# Altium PCB lagd_pcb.PcbDoc (part 2 of 7)
Units mm, origin at the board's own origin, x right, y up, seen from the top; angles counter-clockwise.
Board outline 172 x 145 mm, 6 copper layers (Top Layer, Layer 1, Layer 2, Layer 3, Layer 4, Bottom Layer), stack 0.816 mm thick; 588 components, 338 nets, 2165 pads, 565 vias.
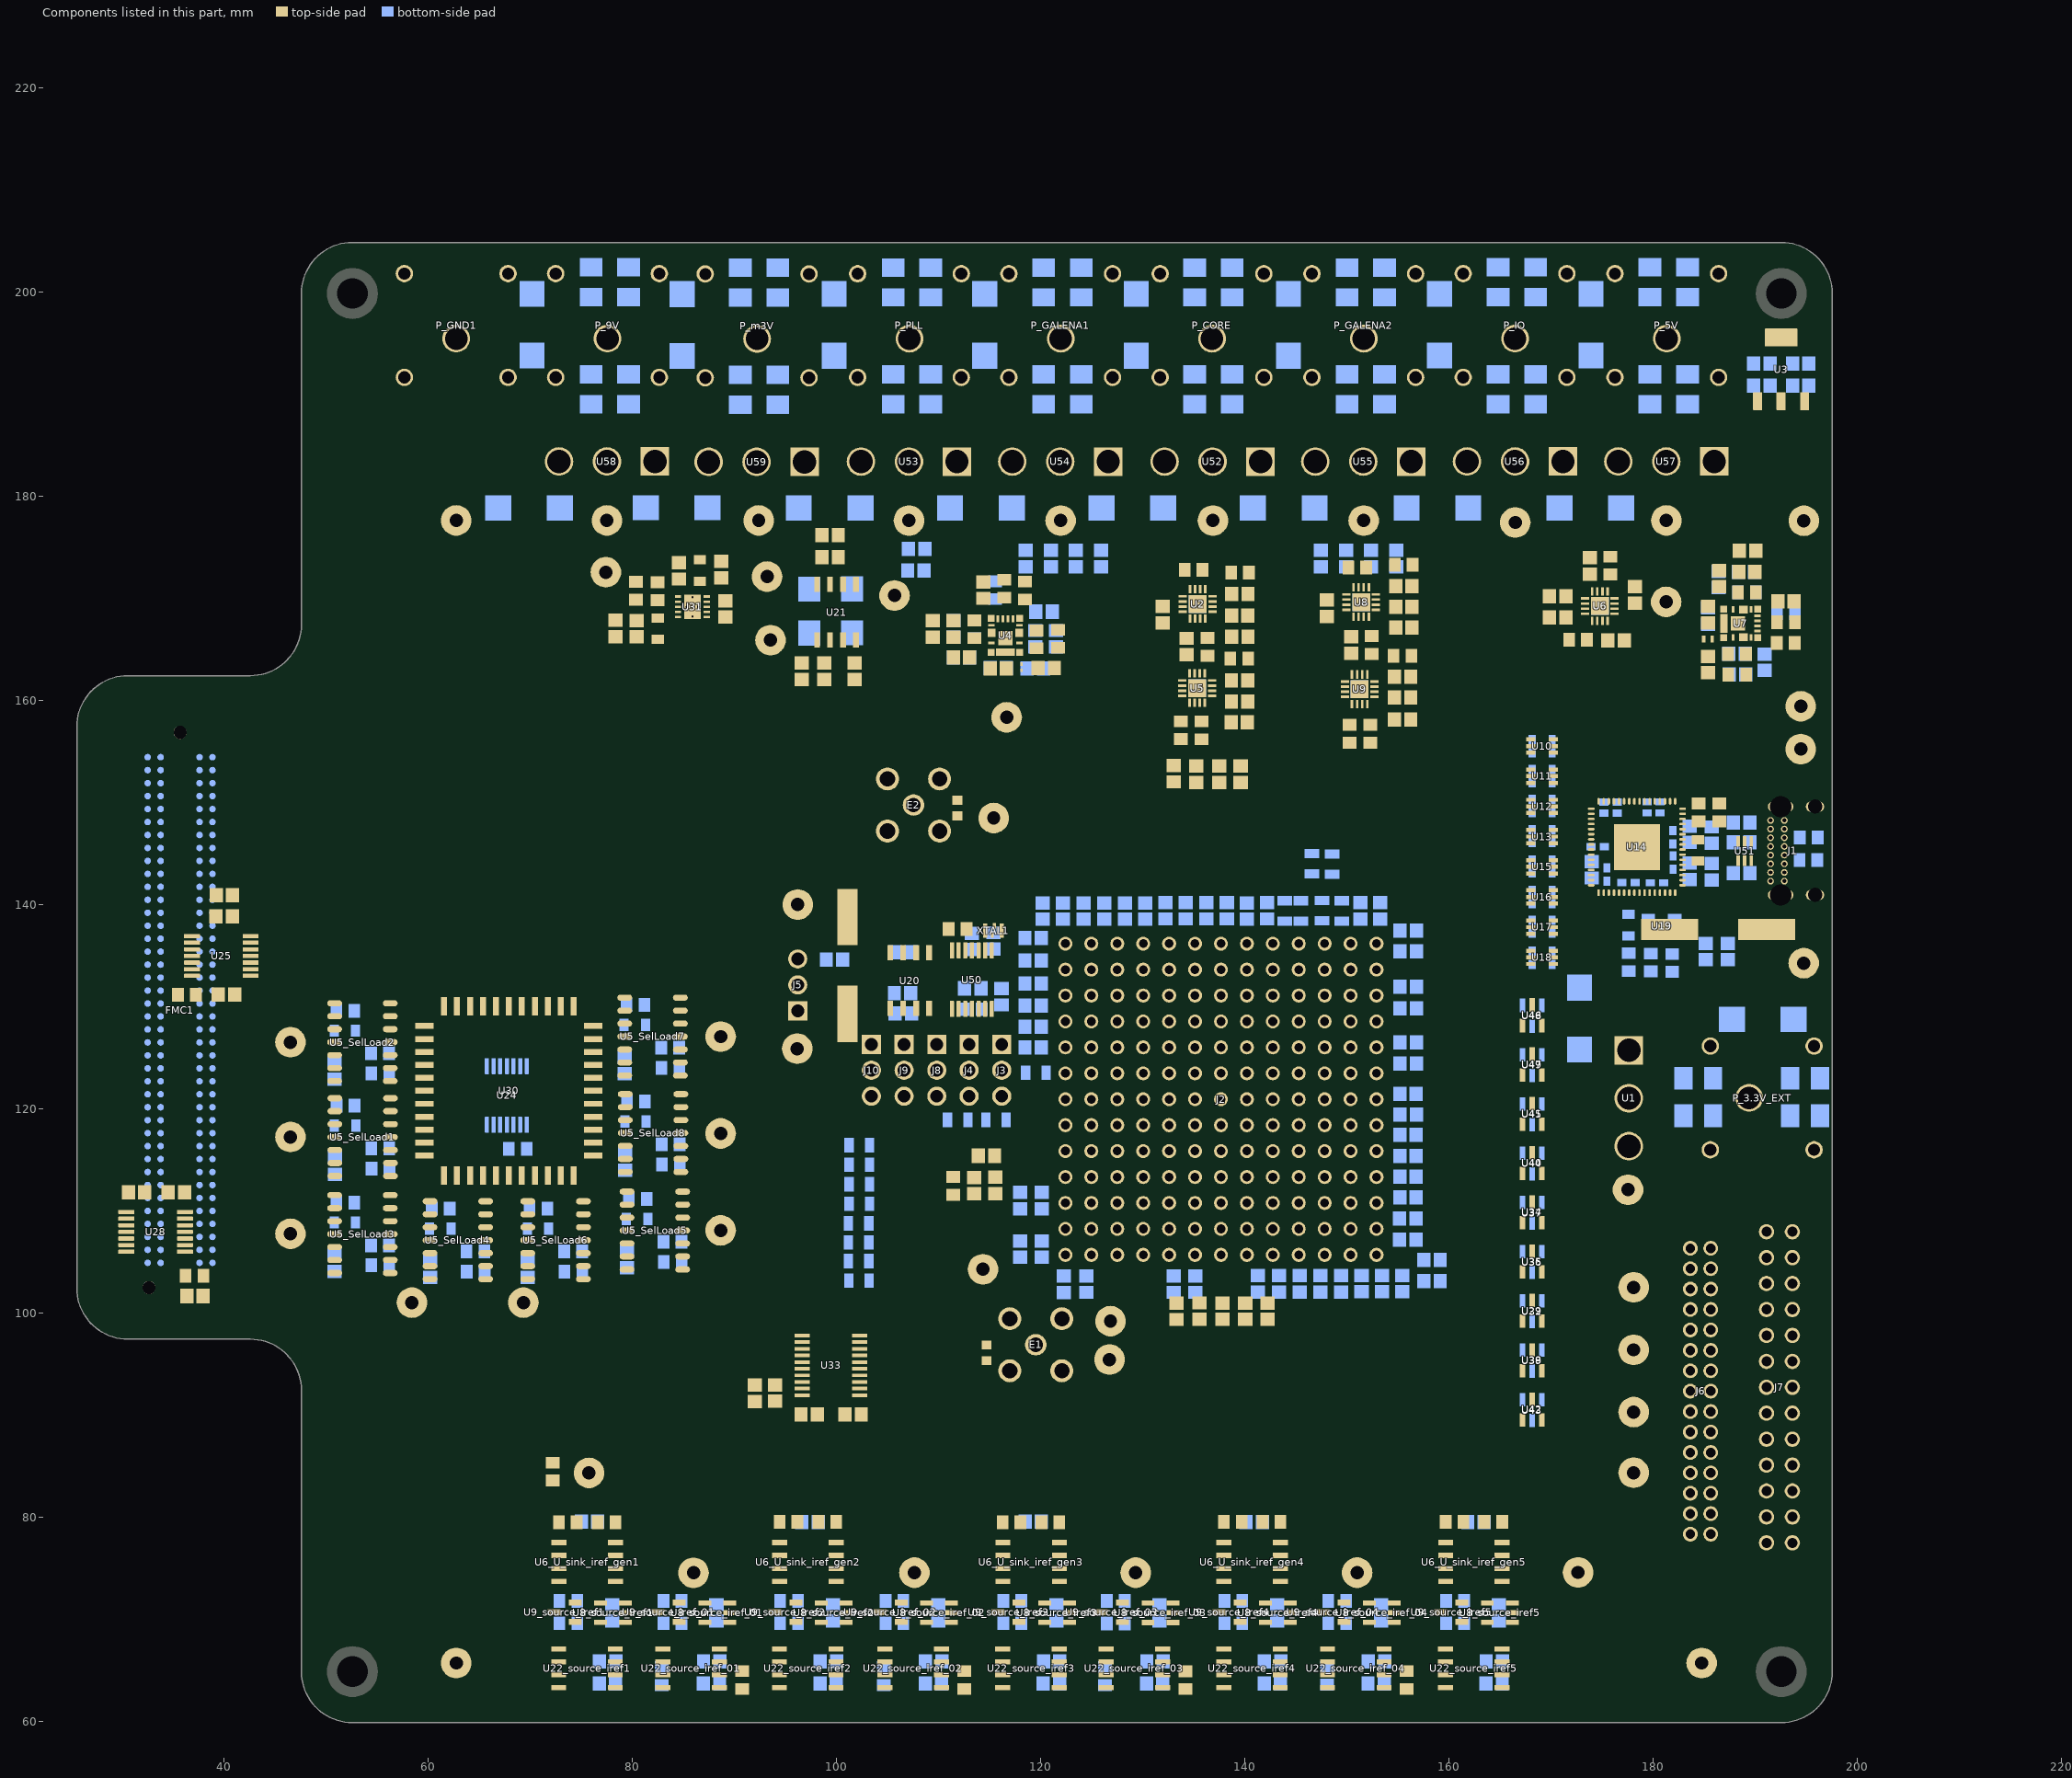
[diagram p6: the components of this part, seen from the top]

## Components (designator, comment, footprint, x,y, rotation, side; value= is the part's Value field where it differs from the comment) (continued)
U22_source_iref_04 "ALD1117SAL" 8-SOIC_ALD 150.88,65.183 r0 top (schematic designator U22)
U24 "TXU0104PWR" SOP65P640X120-14N 67.7,121.3 r270 bottom
U25 "TXU0104PWR" SOP65P640X120-14N 39.728,134.961 r0 top
U28 "TXU0104PWR" SOP65P640X120-14N 33.293,107.931 r0 top
U29 "BAT54LT1G" SOT-23-3_1P4X3P040_ONS 168.15,100.2 r0 top
U30 "HV9308PJ-G" PLCC44_MC_MCH 67.9,121.75 r180 top
U31 "TPS7A3901DSCR" DSC0010J 85.888,169.162 r180 top
U32 "BAT54LT1G" SOT-23-3_1P4X3P040_ONS 168.15,100.15 r0 bottom
U33 "" RU_20_ADI 99.456,94.85 r180 top
U34 "BAT54LT1G" SOT-23-3_1P4X3P040_ONS 168.15,109.85 r0 top
U35 "BAT54LT1G" SOT-23-3_1P4X3P040_ONS 168.15,105.025 r0 top
U36 "BAT54LT1G" SOT-23-3_1P4X3P040_ONS 168.15,104.975 r0 bottom
U37 "BAT54LT1G" SOT-23-3_1P4X3P040_ONS 168.15,109.8 r0 bottom
U38 "BAT54LT1G" SOT-23-3_1P4X3P040_ONS 168.15,95.35 r0 top
U39 "BAT54LT1G" SOT-23-3_1P4X3P040_ONS 168.15,95.325 r0 bottom
U40 "BAT54LT1G" SOT-23-3_1P4X3P040_ONS 168.15,114.675 r0 top
U41 "BAT54LT1G" SOT-23-3_1P4X3P040_ONS 168.15,119.5 r0 top
U42 "BAT54LT1G" SOT-23-3_1P4X3P040_ONS 168.15,90.525 r0 top
U43 "BAT54LT1G" SOT-23-3_1P4X3P040_ONS 168.15,90.475 r0 bottom locked
U44 "BAT54LT1G" SOT-23-3_1P4X3P040_ONS 168.15,114.625 r0 bottom
U45 "BAT54LT1G" SOT-23-3_1P4X3P040_ONS 168.15,119.45 r0 bottom
U46 "BAT54LT1G" SOT-23-3_1P4X3P040_ONS 168.15,129.15 r0 top
U47 "BAT54LT1G" SOT-23-3_1P4X3P040_ONS 168.15,124.325 r0 top
U48 "BAT54LT1G" SOT-23-3_1P4X3P040_ONS 168.15,129.1 r0 bottom
U49 "BAT54LT1G" SOT-23-3_1P4X3P040_ONS 168.15,124.275 r0 bottom
U50 "TXU0104PWR" SOP65P640X120-14N 113.267,132.639 r270 top
U51 "NUP2202W1T2G" SOT-363-6_2P2X1P35_ONS 188.976,145.231 r90 top
U52 "1101M2S3CQE2" 1101M2S3CQE2 141.54,183.389 r270 top locked
U53 "1101M2S3CQE2" 1101M2S3CQE2 111.799,183.39 r270 top locked
U54 "1101M2S3CQE2" 1101M2S3CQE2 126.62,183.39 r270 top locked
U55 "1101M2S3CQE2" 1101M2S3CQE2 156.31,183.39 r270 top locked
U56 "1101M2S3CQE2" 1101M2S3CQE2 171.178,183.4 r270 top
U57 "1101M2S3CQE2" 1101M2S3CQE2 185.998,183.4 r270 top locked
U58 "1101M2S3CQE2" 1101M2S3CQE2 82.207,183.4 r270 top
U59 "1101M2S3CQE2" 1101M2S3CQE2 96.871,183.364 r270 top
VDD1 "Test pad" "Test Pad"#2 177.55,112.1 r0 top
VDD5V "Test pad" "Test Pad"#2 181.26,177.625 r90 top
VDD9V "Test pad" "Test Pad"#2 77.469,177.625 r90 top
VDDA1 "Test pad" "Test Pad"#2 121.921,177.615 r90 top locked
VDDA2 "Test pad" "Test Pad"#2 151.611,177.615 r90 top locked
VDDC "Test pad" "Test Pad"#2 136.841,177.615 r90 top locked
VDDIO "Test pad" "Test Pad"#2 166.461,177.425 r90 top
VPLL "Test pad" "Test Pad"#2 107.061,177.614 r90 top locked
VSSm3V "Test pad" "Test Pad"#2 92.339,177.625 r90 top
XTAL1 "SIT1533AI-H4-DCC-32.768E" XTAL4_SiT1533_SIT 115.367,137.464 r180 top
Y1 "12 MHz" "ABRACON ABLS" 186.375,137.55 r0 top
Y2 "16MHz" "TXC 9C" 101.067,134.04 r90 top

## Footprints (in the part's own frame and the unit in brackets; to place one, negate y for a bottom-side part, rotate by r counter-clockwise, add the part's x,y. Pads: shape width x height; smd on the part's side, far side on the other; paste and mask are expansions set on the pad)
8-SOIC_ALD [mil]
  rect 58x20 smd paste+0 mask+0: 1(-109,75) 2(-109,25) 3(-109,-25) 4(-109,-75) 5(109,-75) 6(109,-25) 7(109,25) 8(109,75)
  silkscreen extent -85,-103 85,103, body extent -124,-98 124,98, height 69
1101M2S3CQE2 [mil]
  rect 110x110 hole 90 paste-99999 mask+0: 1(0,0)
  round 110 hole 90 paste-99999 mask+0: 2(0,-185) 3(0,-370)
  silkscreen extent -135,-440 135,70
"ABRACON ABLS" [mm] "Crystal, 2-Leads, Body 4.70x11.40mm, Pitch 8.80mm, IPC Medium Density"
  rect 5.6x2.1 smd: 1(-4.75,0) 2(4.75,0)
  silkscreen extent -5.77,-2.43 5.77,2.43, body extent -6.35,-2.35 6.35,2.35, height 4.2
"CAP 0805_2012" [mm] "Chip Capacitor, 2-Leads, Body 2.00x1.20mm, IPC Medium Density"
  rect 1.3x1.4 smd: 1(-0.8,0) 2(0.8,0)
  silkscreen extent -1.7,-0.9 1.7,0.9, body extent -1,-0.64 1,0.64, height 1.26
"CAP POL 1411_3528" [mm] "Molded Capacitor, 2-Leads, Body 3.50x2.80mm, IPC Medium Density"
  rect 1.8x2.23 smd: 1(-1.46,0) 2(1.46,0)
  silkscreen extent -3,-1.5 2.71,1.48, body extent -1.87,-1.45 1.87,1.45, height 2
"CAP POL 2917_7343" [mm] "Molded Capacitor, 2-Leads, Body 7.30x4.30mm, IPC Medium Density"
  rect 2.55x2.45 smd: 1(-3.025,0) 2(3.025,0)
  silkscreen extent -4.57,-2.3 3.8,2.3, body extent -3.65,-2.15 3.65,2.15, height 4.1
CONN1_FCR7350R_CLF [mil]
  round 107 hole 87 paste-99999 mask+0: 1(0,0)
  round 67 hole 47 paste-99999 mask+0: 2(-200,149.61) 3(200,149.61) 4(-200,-250.39) 5(200,-250.39)
  silkscreen extent -291,-1087 241,222
CONN26_D13-ST-BK_SUL [mil]
  round 59 / inner round 60 / far side round 59 hole 39 paste-99999 mask+0: 1(0,0) 2(0,-100) 3(100,0) 4(100,-100) 5(200,0) 6(200,-100) 7(300,0) 8(300,-100) 9(400,0) 10(400,-100) 11(500,0) 12(500,-100) 13(600,0) 14(600,-100) 15(700,0) 16(700,-100) 17(800,0) 18(800,-100) 19(900,0) 20(900,-100) 21(1000,0) 22(1000,-100) 23(1100,0) 24(1100,-100) 25(1200,0) 26(1200,-100)
  silkscreen extent -242,-228 1402,128
CONN_169-PRS13001-12_ARS [mil]
  round 54 hole 34 paste-99999 mask+0: A1(-682.5,-814) A2(-582.5,-814) A3(-482.5,-814) A4(-382.5,-814) A5(-282.5,-814) A6(-182.5,-814) A7(-82.5,-814) A8(17.5,-814) A9(117.5,-814) A10(217.5,-814) A11(317.5,-814) A12(417.5,-814) A13(517.5,-814) B1(-682.5,-714) B2(-582.5,-714) B3(-482.5,-714) B4(-382.5,-714) B5(-282.5,-714) B6(-182.5,-714) B7(-82.5,-714) B8(17.5,-714) B9(117.5,-714) B10(217.5,-714) B11(317.5,-714) B12(417.5,-714) B13(517.5,-714) C1(-682.5,-614) C2(-582.5,-614) C3(-482.5,-614) C4(-382.5,-614) C5(-282.5,-614) C6(-182.5,-614) C7(-82.5,-614) C8(17.5,-614) C9(117.5,-614) C10(217.5,-614) C11(317.5,-614) C12(417.5,-614) C13(517.5,-614) D1(-682.5,-514) D2(-582.5,-514) D3(-482.5,-514) D4(-382.5,-514) D5(-282.5,-514) D6(-182.5,-514) D7(-82.5,-514) D8(17.5,-514) D9(117.5,-514) D10(217.5,-514) D11(317.5,-514) D12(417.5,-514) D13(517.5,-514) E1(-682.5,-414) E2(-582.5,-414) E3(-482.5,-414) E4(-382.5,-414) E5(-282.5,-414) E6(-182.5,-414) E7(-82.5,-414) E8(17.5,-414) E9(117.5,-414) E10(217.5,-414) E11(317.5,-414) E12(417.5,-414) E13(517.5,-414) F1(-682.5,-314) F2(-582.5,-314) F3(-482.5,-314) F4(-382.5,-314) F5(-282.5,-314) F6(-182.5,-314) F7(-82.5,-314) F8(17.5,-314) F9(117.5,-314) F10(217.5,-314) F11(317.5,-314) F12(417.5,-314) F13(517.5,-314) G1(-682.5,-214) G2(-582.5,-214) G3(-482.5,-214) G4(-382.5,-214) G5(-282.5,-214) G6(-182.5,-214) G7(-82.5,-214) G8(17.5,-214) G9(117.5,-214) G10(217.5,-214) G11(317.5,-214) G12(417.5,-214) G13(517.5,-214) H1(-682.5,-114) H2(-582.5,-114) H3(-482.5,-114) H4(-382.5,-114) H5(-282.5,-114) H6(-182.5,-114) H7(-82.5,-114) H8(17.5,-114) H9(117.5,-114) H10(217.5,-114) H11(317.5,-114) H12(417.5,-114) H13(517.5,-114) J1(-682.5,-14) J2(-582.5,-14) J3(-482.5,-14) J4(-382.5,-14) J5(-282.5,-14) J6(-182.5,-14) J7(-82.5,-14) J8(17.5,-14) J9(117.5,-14) J10(217.5,-14) J11(317.5,-14) J12(417.5,-14) J13(517.5,-14) K1(-682.5,86) K2(-582.5,86) K3(-482.5,86) K4(-382.5,86) K5(-282.5,86) K6(-182.5,86) K7(-82.5,86) K8(17.5,86) K9(117.5,86) K10(217.5,86) K11(317.5,86) K12(417.5,86) K13(517.5,86) L1(-682.5,186) L2(-582.5,186) L3(-482.5,186) L4(-382.5,186) L5(-282.5,186) L6(-182.5,186) L7(-82.5,186) L8(17.5,186) L9(117.5,186) L10(217.5,186) L11(317.5,186) L12(417.5,186) L13(517.5,186) M1(-682.5,286) M2(-582.5,286) M3(-482.5,286) M4(-382.5,286) M5(-282.5,286) M6(-182.5,286) M7(-82.5,286) M8(17.5,286) M9(117.5,286) M10(217.5,286) M11(317.5,286) M12(417.5,286) M13(517.5,286) N1(-682.5,386) N2(-582.5,386) N3(-482.5,386) N4(-382.5,386) N5(-282.5,386) N6(-182.5,386) N7(-82.5,386) N8(17.5,386) N9(117.5,386) N10(217.5,386) N11(317.5,386) N12(417.5,386) N13(517.5,386)
  silkscreen extent -930,-952 842,1171
CONN_SD-87758-107_30_MOL [mil]
  round 57 / inner round 60 / far side round 57 hole 37 paste-99999 mask+0: 1(0,0) 2(0,-78.74) 3(78.74,0) 4(78.74,-78.74) 5(157.48,0) 6(157.48,-78.74) 7(236.22,0) 8(236.22,-78.74) 9(314.96,0) 10(314.96,-78.74) 11(393.7,0) 12(393.7,-78.74) 13(472.44,0) 14(472.44,-78.74) 15(551.18,0) 16(551.18,-78.74) 17(629.92,0) 18(629.92,-78.74) 19(708.66,0) 20(708.66,-78.74) 21(787.4,0) 22(787.4,-78.74) 23(866.14,0) 24(866.14,-78.74) 25(944.88,0) 26(944.88,-78.74) 27(1023.62,0) 28(1023.62,-78.74) 29(1102.36,0) 30(1102.36,-78.74)
  silkscreen extent -92,-123 1145,44
D0014A_N [mm]
  oval 1.45x0.6 smd paste+0 mask+0: 1(-2.725,3.81) 2(-2.725,2.54) 3(-2.725,1.27) 4(-2.725,0) 5(-2.725,-1.27) 6(-2.725,-2.54) 7(-2.725,-3.81) 8(2.725,-3.81) 9(2.725,-2.54) 10(2.725,-1.27) 11(2.725,0) 12(2.725,1.27) 13(2.725,2.54) 14(2.725,3.81)
  silkscreen extent -3.3,-4.4 0.9,4.4
DBV5_TEX [mil]
  rect 49.56x20 smd paste+0 mask+0: 1(-48,37.4) 2(-48,0) 3(-48,-37.4) 4(48,-37.4) 5(48,37.4)
  silkscreen extent -40,-65 40,65, body extent -59,-60 59,60, height 67
DCY0004A_N [mm] "SOT223, 4-Leads, Body 6.7x3.7mm, Pitch 2.3mm, IPC Medium Density"
  rrect11% 1.75x0.9 smd: 1(-3.125,2.3) 2(-3.125,0) 3(-3.125,-2.3)
  rrect6% 1.75x3.2 smd: 4(3.125,0)
  silkscreen extent -3.25,-3.35 1.95,3.42, body extent -3.5,-3.25 3.5,3.25, height 1.62
"DO214AA SMB" [mm] "Molded Diode, 2-Leads, Body 4.31x3.62mm, IPC Medium Density"
  rect 2.45x2.15 smd: 1(-2.15,0) 2(2.15,0)
  silkscreen extent -3.6,-1.8 3.8,1.8, body extent -2.6,-1.8 2.6,1.8, height 2.4
DSC0010J [mm]
  rect 0.6x0.25 smd paste+0 mask+0: 1(-1.4,1) 2(-1.4,0.5) 3(-1.4,0) 4(-1.4,-0.5) 5(-1.4,-1) 6(1.4,-1) 7(1.4,-0.5) 8(1.4,0) 9(1.4,0.5) 10(1.4,1)
  round 0.5 hole 0.203 paste-2539.97 mask-0.051: 11(-0.575,0) 11(0,0.95) 11(0,-0.95) 11(0.575,0)
  rect 1.65x2.4 smd paste-1.187 mask-1.181: 11(0,0)
  Top Layer region: -0.325,-1.7 -0.375,-1.65 -0.375,-1.2 -0.775,-1.2 -0.825,-1.15 -0.825,1.15 -0.775,1.2 -0.375,1.2 -0.375,1.65 -0.325,1.7 -0.325,1.7 -0.175,1.7 -0.175,1.7 -0.125,1.65 -0.125,1.2 0.125,1.2 0.125,1.65 0.175,1.7 0.175,1.7 0.325,1.7 0.325,1.7 0.375,1.65 0.375,1.2 0.775,1.2 0.825,1.15 0.825,-1.15 0.775,-1.2 0.375,-1.2 0.375,-1.65 0.325,-1.7 0.175,-1.7 0.125,-1.65 0.125,-1.2 -0.125,-1.2 -0.125,-1.65 -0.175,-1.7
  silkscreen extent -1.65,-1.65 1.65,1.65
"FER 0805_2012" [mm] "Chip Ferrite, 2-Leads, Body 2.00x1.20mm, IPC Medium Density"
  rect 1.3x1.4 smd: 1(-0.8,0) 2(0.8,0)
  silkscreen extent -1.7,-0.9 1.7,0.9, body extent -1,-0.64 1,0.64, height 1.26
FP-USB4085-GF-A-MFG [mm]
  round 0.65 hole 0.4 paste-2539.97 mask+0: 1(-2.975,4.025) 2(-2.125,4.025) 3(-1.275,4.025) 4(-0.425,4.025) 5(0.425,4.025) 6(1.275,4.025) 7(2.125,4.025) 8(2.975,4.025) 9(-2.975,2.675) 10(-2.125,2.675) 11(-1.275,2.675) 12(-0.425,2.675) 13(0.425,2.675) 14(1.275,2.675) 15(2.125,2.675) 16(2.975,2.675)
  rrect100% 1x2.5 hole 2.1 slot 0.6 at 0 deg paste-2539.97 mask+0: 17(-4.325,3.045) 18(4.325,3.045)
  rrect100% 1x1.8 hole 1.4 slot 0.6 at 0 deg paste-2539.97 mask+0: 19(-4.325,-0.335) 20(4.325,-0.335)
  silkscreen extent -4.58,0.89 4.57,5.37, body extent -4.87,-4.83 4.87,4.83, height 0.25
"IND 0201_0603" [mm] "Inductor, 2-Leads, Body 0.60x0.30mm, IPC Medium Density"
  rect 0.35x0.25 smd: 1(-0.31,0) 2(0.31,0)
  silkscreen extent -0.67,-0.33 0.67,0.33, body extent -0.3,-0.15 0.3,0.15, height 0.3
"Murata LQW15 0402" [mm] "Chip Inductor, 2-Leads, Body 1.00x0.50mm, IPC High Density"
  rect 0.35x0.65 smd: 1(-0.425,0) 2(0.425,0)
  silkscreen extent -0.8,-0.5 0.8,0.5, body extent -0.5,-0.29 0.5,0.29, height 0.51
PLCC44_MC_MCH [mil]
  rect 23x71 smd paste+0 mask+0: 1(0,326) 2(-50,326) 3(-100,326) 4(-150,326) 5(-200,326) 6(-250,326) 18(-250,-326) 19(-200,-326) 20(-150,-326) 21(-100,-326) 22(-50,-326) 23(0,-326) 24(50,-326) 25(100,-326) 26(150,-326) 27(200,-326) 28(250,-326) 40(250,326) 41(200,326) 42(150,326) 43(100,326) 44(50,326)
  rect 71x23 smd paste+0 mask+0: 7(-326,250) 8(-326,200) 9(-326,150) 10(-326,100) 11(-326,50) 12(-326,0) 13(-326,-50) 14(-326,-100) 15(-326,-150) 16(-326,-200) 17(-326,-250) 29(326,-250) 30(326,-200) 31(326,-150) 32(326,-100) 33(326,-50) 34(326,0) 35(326,50) 36(326,100) 37(326,150) 38(326,200) 39(326,250)
  silkscreen extent -382,-382 382,382, body extent -348,-348 348,348, height 180
QFN64_2_L [mm] "QFN, 64-Leads, Body 9x9mm, Pitch 0.5mm, Thermal Pad 4.5x4.5mm, IPC High Density"
  oval 0.65x0.25 smd: 1(-4.475,3.75) 2(-4.475,3.25) 3(-4.475,2.75) 4(-4.475,2.25) 5(-4.475,1.75) 6(-4.475,1.25) 7(-4.475,0.75) 8(-4.475,0.25) 9(-4.475,-0.25) 10(-4.475,-0.75) 11(-4.475,-1.25) 12(-4.475,-1.75) 13(-4.475,-2.25) 14(-4.475,-2.75) 15(-4.475,-3.25) 16(-4.475,-3.75) 33(4.475,-3.75) 34(4.475,-3.25) 35(4.475,-2.75) 36(4.475,-2.25) 37(4.475,-1.75) 38(4.475,-1.25) 39(4.475,-0.75) 40(4.475,-0.25) 41(4.475,0.25) 42(4.475,0.75) 43(4.475,1.25) 44(4.475,1.75) 45(4.475,2.25) 46(4.475,2.75) 47(4.475,3.25) 48(4.475,3.75)
  oval 0.25x0.65 smd: 17(-3.75,-4.475) 18(-3.25,-4.475) 19(-2.75,-4.475) 20(-2.25,-4.475) 21(-1.75,-4.475) 22(-1.25,-4.475) 23(-0.75,-4.475) 24(-0.25,-4.475) 25(0.25,-4.475) 26(0.75,-4.475) 27(1.25,-4.475) 28(1.75,-4.475) 29(2.25,-4.475) 30(2.75,-4.475) 31(3.25,-4.475) 32(3.75,-4.475) 49(3.75,4.475) 50(3.25,4.475) 51(2.75,4.475) 52(2.25,4.475) 53(1.75,4.475) 54(1.25,4.475) 55(0.75,4.475) 56(0.25,4.475) 57(-0.25,4.475) 58(-0.75,4.475) 59(-1.25,4.475) 60(-1.75,4.475) 61(-2.25,4.475) 62(-2.75,4.475) 63(-3.25,4.475) 64(-3.75,4.475)
  rect 4.5x4.5 smd: 65(0,0)
  silkscreen extent -5.47,-4.69 4.69,4.69, body extent -4.54,-4.54 4.54,4.54, height 1
"RES 0805_2012" [mm] "Chip Resistor, 2-Leads, Body 2.00x1.25mm, IPC Medium Density"
  rect 1.15x1.35 smd: 1(-0.875,0) 2(0.875,0)
  silkscreen extent -1.7,-0.9 1.7,0.9, body extent -1,-0.62 1,0.63, height 0.6
RESC1508X50N [mm]
  rect 0.86x0.98 smd paste+0 mask+0.102: 1(-0.765,0) 2(0.765,0)
  body extent -0.77,-0.43 0.77,0.43, height 0.5
RESC2012X50N [mm]
  rect 0.92x1.42 smd: 1(-1,0) 2(1,0)
  silkscreen extent -0.22,-0.7 0.22,0.7, body extent -1,-0.63 1,0.63, height 0.5
RU_20_ADI [mil]
  rect 58x14 smd paste+0 mask+0: 1(-111,115.16) 2(-111,89.57) 3(-111,63.98) 4(-111,38.39) 5(-111,12.8) 6(-111,-12.8) 7(-111,-38.39) 8(-111,-63.98) 9(-111,-89.57) 10(-111,-115.16) 11(111,-115.16) 12(111,-89.57) 13(111,-63.98) 14(111,-38.39) 15(111,-12.8) 16(111,12.8) 17(111,38.39) 18(111,63.98) 19(111,89.57) 20(111,115.16)
  silkscreen extent -160,-135 160,135, body extent -126,-130 126,130, height 47
RZR0016A-MFG_THERMAL [mm] "add thermal dissipation plane at PGND back"
  rect 0.675x0.675 smd paste-0.325 mask-0.33: 1(-1.412,1.663) 5(-1.412,-1.663) 7(1.412,-1.663) 11(1.412,1.663)
  rect 0.65x0.25 smd paste+0 mask-0.318: 2(-1.375,1) 10(1.375,1)
  rect 0.8x0.85 smd paste-0.412 mask-0.406: 3(-1.35,0.25) 9(1.35,0.25)
  rect 0.65x0.25 smd paste-0.312 mask-0.318: 4(-1.375,-0.75) 8(1.375,-0.75)
  rect 1.85x0.7 smd paste-0.912 mask-0.914: 6(0,-1.65)
  rect 0.25x0.65 smd paste+0 mask-0.318: 12(0.75,1.625) 13(0.25,1.625) 14(-0.25,1.625) 15(-0.75,1.625)
  rect 1.375x1.375 smd paste+0 mask+0: 16(0,-0.268)
  Top Layer region: -1.65,-1.175 -1.75,-1.075 -1.75,-0.425 -1.65,-0.325 -0.85,-0.325 -0.8,-0.275 -0.8,-0.206 -0.775,-0.163 -0.75,-0.119 -0.75,0.95 -0.65,1.05 0.65,1.05 0.75,0.95 0.75,-0.119 0.775,-0.163 0.8,-0.206 0.8,-0.275 0.85,-0.325 1.65,-0.325 1.75,-0.425 1.75,-1.075 1.65,-1.175 1.074,-1.175 1,-1.1 -1,-1.1 -1.074,-1.175
  Bottom Layer region: -1.905,-2.159 1.905,-2.159 1.905,-0.309 -1.905,-0.309
  Bottom Layer region: -0.762,-0.381 0.762,-0.381 0.762,1.143 -0.762,1.143
  silkscreen extent -2.42,-2.17 1.92,2.17
SAMTEC_ASP-134604-01 [mm]
  round 0.64 smd: C1(24.765,3.175) C2(23.495,3.175) C3(22.225,3.175) C4(20.955,3.175) C5(19.685,3.175) C6(18.415,3.175) C7(17.145,3.175) C8(15.875,3.175) C9(14.605,3.175) C10(13.335,3.175) C11(12.065,3.175) C12(10.795,3.175) C13(9.525,3.175) C14(8.255,3.175) C15(6.985,3.175) C16(5.715,3.175) C17(4.445,3.175) C18(3.175,3.175) C19(1.905,3.175) C20(0.635,3.175) C21(-0.635,3.175) C22(-1.905,3.175) C23(-3.175,3.175) C24(-4.445,3.175) C25(-5.715,3.175) C26(-6.985,3.175) C27(-8.255,3.175) C28(-9.525,3.175) C29(-10.795,3.175) C30(-12.065,3.175) C31(-13.335,3.175) C32(-14.605,3.175) C33(-15.875,3.175) C34(-17.145,3.175) C35(-18.415,3.175) C36(-19.685,3.175) C37(-20.955,3.175) C38(-22.225,3.175) C39(-23.495,3.175) C40(-24.765,3.175) D1(24.765,1.905) D2(23.495,1.905) D3(22.225,1.905) D4(20.955,1.905) D5(19.685,1.905) D6(18.415,1.905) D7(17.145,1.905) D8(15.875,1.905) D9(14.605,1.905) D10(13.335,1.905) D11(12.065,1.905) D12(10.795,1.905) D13(9.525,1.905) D14(8.255,1.905) D15(6.985,1.905) D16(5.715,1.905) D17(4.445,1.905) D18(3.175,1.905) D19(1.905,1.905) D20(0.635,1.905) D21(-0.635,1.905) D22(-1.905,1.905) D23(-3.175,1.905) D24(-4.445,1.905) D25(-5.715,1.905) D26(-6.985,1.905) D27(-8.255,1.905) D28(-9.525,1.905) D29(-10.795,1.905) D30(-12.065,1.905) D31(-13.335,1.905) D32(-14.605,1.905) D33(-15.875,1.905) D34(-17.145,1.905) D35(-18.415,1.905) D36(-19.685,1.905) D37(-20.955,1.905) D38(-22.225,1.905) D39(-23.495,1.905) D40(-24.765,1.905) G1(24.765,-1.905) G2(23.495,-1.905) G3(22.225,-1.905) G4(20.955,-1.905) G5(19.685,-1.905) G6(18.415,-1.905) G7(17.145,-1.905) G8(15.875,-1.905) G9(14.605,-1.905) G10(13.335,-1.905) G11(12.065,-1.905) G12(10.795,-1.905) G13(9.525,-1.905) G14(8.255,-1.905) G15(6.985,-1.905) G16(5.715,-1.905) G17(4.445,-1.905) G18(3.175,-1.905) G19(1.905,-1.905) G20(0.635,-1.905) G21(-0.635,-1.905) G22(-1.905,-1.905) G23(-3.175,-1.905) G24(-4.445,-1.905) G25(-5.715,-1.905) G26(-6.985,-1.905) G27(-8.255,-1.905) G28(-9.525,-1.905) G29(-10.795,-1.905) G30(-12.065,-1.905) G31(-13.335,-1.905) G32(-14.605,-1.905) G33(-15.875,-1.905) G34(-17.145,-1.905) G35(-18.415,-1.905) G36(-19.685,-1.905) G37(-20.955,-1.905) G38(-22.225,-1.905) G39(-23.495,-1.905) G40(-24.765,-1.905) H1(24.765,-3.175) H2(23.495,-3.175) H3(22.225,-3.175) H4(20.955,-3.175) H5(19.685,-3.175) H6(18.415,-3.175) H7(17.145,-3.175) H8(15.875,-3.175) H9(14.605,-3.175) H10(13.335,-3.175) H11(12.065,-3.175) H12(10.795,-3.175) H13(9.525,-3.175) H14(8.255,-3.175) H15(6.985,-3.175) H16(5.715,-3.175) H17(4.445,-3.175) H18(3.175,-3.175) H19(1.905,-3.175) H20(0.635,-3.175) H21(-0.635,-3.175) H22(-1.905,-3.175) H23(-3.175,-3.175) H24(-4.445,-3.175) H25(-5.715,-3.175) H26(-6.985,-3.175) H27(-8.255,-3.175) H28(-9.525,-3.175) H29(-10.795,-3.175) H30(-12.065,-3.175) H31(-13.335,-3.175) H32(-14.605,-3.175) H33(-15.875,-3.175) H34(-17.145,-3.175) H35(-18.415,-3.175) H36(-19.685,-3.175) H37(-20.955,-3.175) H38(-22.225,-3.175) H39(-23.495,-3.175) H40(-24.765,-3.175)
  round 1.27 hole 1.27 unplated: ""(-27.191,-3.05) ""(27.19,0)
  silkscreen extent -27.89,-7.35 28.78,7.35
"SC70 - duplicate" [mm]
  rect 0.9x0.4 smd: 1(0,0) 2(0,-0.65) 3(0,-1.3) 4(2.2,-1.3) 5(2.2,-0.65) 6(2.2,0)
  silkscreen extent -0.08,-1.62 1.29,0.86
"smd C0402" [mm] "Chip Capacitor; Body 1.0 x 0.5 mm (LxW typ)"
  rect 0.9x0.7 smd: 1(-0.65,0) 2(0.65,0)
  silkscreen extent -1.4,-0.25 -1.4,0.25
SOIC8_4X5_INR [mil]
  rect 57.5x22 smd paste+0 mask+0: 1(-107.25,75) 2(-107.25,25) 3(-107.25,-25) 4(-107.25,-75) 5(107.25,-75) 6(107.25,-25) 7(107.25,25) 8(107.25,75)
  silkscreen extent -84,-104 84,104, body extent -122,-99 122,99, height 69
SOIC8_150MIL_REN [mil]
  rect 57.5x22 smd paste+0 mask+0: 1(-107.25,75) 2(-107.25,25) 3(-107.25,-25) 4(-107.25,-75) 5(107.25,-75) 6(107.25,-25) 7(107.25,25) 8(107.25,75)
  silkscreen extent -84,-104 84,104, body extent -122,-99 122,99, height 69
SOP65P640X120-14N [mm]
  rrect25% 1.57x0.41 smd: 1(-2.87,1.95) 2(-2.87,1.3) 3(-2.87,0.65) 4(-2.87,0) 5(-2.87,-0.65) 6(-2.87,-1.3) 7(-2.87,-1.95) 8(2.87,-1.95) 9(2.87,-1.3) 10(2.87,-0.65) 11(2.87,0) 12(2.87,0.65) 13(2.87,1.3) 14(2.87,1.95)
  silkscreen extent -4.41,-2.5 2.2,2.5, body extent -3.2,-2.5 3.2,2.5, height 1.2
SOT-23-3_1P4X3P040_ONS [mil]
  rect 22x52 smd paste+0 mask+0: 1(-37.5,-40) 2(37.5,-40) 3(0,40)
  silkscreen extent -65,-99 65,32, body extent -60,-52 60,52, height 44
SOT-23-6_MC_MCH [mil]
  rect 52x22 smd paste+0 mask+0: 1(-51,37.4) 2(-51,0) 3(-51,-37.4) 4(51,-37.4) 5(51,0) 6(51,37.4)
  silkscreen extent -40,-66 40,66, body extent -63,-61 63,61, height 57
SOT-23_3L_ONS [mil]
  rect 22.36x49.56 smd paste+0 mask+0: 1(-37.5,-41) 2(37.5,-41) 3(0,41)
  silkscreen extent -65,-99 65,33, body extent -60,-52 60,52, height 44
SOT-363-6_2P2X1P35_ONS [mil]
  rect 40x14 smd paste+0 mask+0: 1(-37.5,25.59) 2(-37.5,0) 3(-37.5,-25.59) 4(37.5,-25.59) 5(37.5,0) 6(37.5,25.59)
  silkscreen extent -32,-48 32,48, body extent -44,-44 44,44, height 43
TE_1-1478979-0 [mm]
  round 2.1 hole 1.4: 1(0,0)
  round 2.25 hole 1.5: SH1(-2.55,2.55) SH2(2.55,2.55) SH3(2.55,-2.55) SH4(-2.55,-2.55)
  silkscreen extent -3.17,-3.17 3.17,3.17, body extent -3.17,-3.17 3.17,3.17, height 9.5
"Test Pad"#1 [mm]
  round 3 hole 1.3: 1(-12,-8.816)
"Test Pad"#2 [mm]
  round 3 hole 1.3: 1(0,-0.039)
"Test Pad"#3 [mm]
  round 3 hole 1.3: 1(0,0.961)
"Test Pad"#4 [mm]
  round 3 hole 1.3: 1(0,9.961)
"Test Pad"#5 [mm]
  round 3 hole 1.3: 1(200,-0.039)
"TXC 9C" [mm] "Crystal, 2-Leads, Body 4.70x11.40mm, Pitch 8.80mm, IPC Medium Density"
  rect 5.5x2 smd: 1(-4.75,0) 2(4.75,0)
  silkscreen extent -5.77,-2.43 5.77,2.43, body extent -6.35,-2.35 6.35,2.35, height 4.2
WQFN16_RTE_TEX_THERMAL [mil] "with heat dissipation holes at back"
  rect 32x10 smd paste+0 mask+0: 1(-57,29.53) 2(-57,9.84) 3(-57,-9.85) 4(-57,-29.54) 9(57,-29.54) 10(57,-9.85) 11(57,9.84) 12(57,29.53)
  rect 10x32 smd paste+0 mask+0: 5(-29.54,-57) 6(-9.85,-57) 7(9.84,-57) 8(29.53,-57) 13(29.53,57) 14(9.84,57) 15(-9.85,57) 16(-29.54,57)
  rect 69.02x69.02 smd far side: 17(0,0)
  rect 69x69 smd paste+0 mask+0: 17(0,0)
  silkscreen extent -66,-66 93,66, body extent -61,-61 61,61, height 32
WURTH_61300311121 [mm]
  rect 1.875x1.875 / inner round 1.875 / far side rect 1.875x1.875 hole 1.25: 1(-2.54,0)
  round 1.875 hole 1.25: 2(0,0) 3(2.54,0)
  silkscreen extent -4.45,-1.27 3.81,1.27, body extent -3.81,-1.27 3.81,1.27, height 7.27
XTAL4_SiT1533_SIT [mil]
  rect 16x55 smd paste+0 mask+0: 1(-31.5,0) 3(31.5,0)
  rect 12x20 smd paste+0 mask+0: 2(-3.9,-17.56) 4(4.17,17.56)
"YAGEO RES 0805_2012" [mm] "Chip Resistor, 2-Leads, Body 2.00x1.25mm"
  rect 0.9x1.2 smd: 1(-1.05,0) 2(1.05,0)
  silkscreen extent -1.7,-0.8 1.7,0.8, body extent -1,-0.62 1,0.63, height 0.6

## Part data
C1 C5 C6 C8 C9 C96 C97 C99 C100 C101 C102 C104 C105 C108 C109 C186 C193 C195 C214 C215 C221 C222 C224 C225 C228 C229 C231 C232 C233 C234 C236 C244 C247 C248 C250 C251: library part 293D107X06R3B2TE3, "CAP TANT 100UF 20% 6.3V 1411", Device Package="1411 (3528 Metric)", ESR (Equivalent Series Resistance)=1.7Ohm, MANUFACTURER="Vishay Sprague", Manufacturer Size Code=B, Operating Temperature="-55°C ~ 125°C", Supplier Part Number 1=718-293D107X06R3B2TE3CT-ND, Tolerance=±20%, Voltage - Rated="6.3 V", Capacitance="100 µF", ComponentLink1Description=Datasheet, ComponentLink1URL=http://www.vishay.com/docs/40002/293d.pdf, ComponentLink2Description="DigiKey Link", ComponentLink2URL=https://www.digikey.com/en/products/detail/vishay-sprague/293D107X06R3B2TE3/1578632, Features="General Purpose", Height - Seated (Max)="0.083\" (2.11mm)", lastupdated="4/5/2026 8:12:05 PM", Lifecycle Status=Active, Minimum Order=1, Mounting Type="Surface Mount", Package / Case="1411 (3528 Metric)", packaging=TapeAndReel, PART NUMBER=293D107X06R3B2TE3, Part Status=Active, partid=1463, Price=0.14, series="TANTAMOUNT™, 293D", Size / Dimension="0.138\" L x 0.110\" W (3.50mm x 2.80mm)", Supplier 1=DigiKey, Type=Molded
C2_source_iref1 C2_source_iref2 C2_source_iref3 C2_source_iref4 C2_source_iref5 C2_source_iref_01 C2_source_iref_02 C2_source_iref_03 C2_source_iref_04 C206 C207 C208: library part 500R15N101JV4T, "CAP CER 100PF 50V C0G/NP0 0805", Device Package="0805 (2012 Metric)", MANUFACTURER="Johanson Dielectrics Inc.", Operating Temperature="-55°C ~ 125°C", Supplier Part Number 1=709-1176-1-ND, Temperature Coefficient="C0G, NP0", Tolerance=±5%, Voltage - Rated=50V, Applications="General Purpose", Capacitance="100 pF", ComponentLink1Description=Datasheet, ComponentLink1URL=https://www.johansondielectrics.com/downloads/catalog/johanson-dielectrics-product-catalog.pdf, ComponentLink2Description="DigiKey Link", ComponentLink2URL=https://www.digikey.com/en/products/detail/johanson-dielectrics-inc/500R15N101JV4T/1859421, lastupdated="4/6/2026 7:32:47 PM", Lifecycle Status=Active, Minimum Order=1, Mounting Type="Surface Mount, MLCC", Package / Case="0805 (2012 Metric)", packaging=TapeAndReel, PART NUMBER=500R15N101JV4T, Part Status=Active, partid=11835, Price=0.02, series=-, Size / Dimension="0.080\" L x 0.050\" W (2.03mm x 1.27mm)", Supplier 1=DigiKey, Thickness (Max)="0.050\" (1.27mm)"
C3 C4: library part C0805C103F3GECTU, "CAP CER 0805 10NF 25V C0G 1%", Device Package="0805 (2012 Metric)", MANUFACTURER=KEMET, Operating Temperature="-55°C ~ 125°C", Supplier Part Number 1=399-C0805C103F3GECTUCT-ND, Temperature Coefficient="C0G, NP0", Tolerance=±1%, Voltage - Rated=25V, Applications="ESD Protection", Capacitance="10000 pF", ComponentLink1Description=Datasheet, ComponentLink1URL=https://search.kemet.com/download/datasheet/C0805C103F3GEC7800, ComponentLink2Description="DigiKey Link", ComponentLink2URL=https://www.digikey.com/en/products/detail/kemet/C0805C103F3GECTU/8644419, Features="Low ESL, Low ESR", lastupdated="4/6/2026 7:28:54 PM", Lifecycle Status=Active, Minimum Order=1, Mounting Type="Surface Mount, MLCC", Package / Case="0805 (2012 Metric)", packaging=TapeAndReel, PART NUMBER=C0805C103F3GECTU, partid=70642, Price=0.46, series="ESD SMD Comm C0G", Size / Dimension="0.079\" L x 0.049\" W (2.00mm x 1.25mm)", Supplier 1=DigiKey, Thickness (Max)="0.039\" (1.00mm)"
C7 C10 C11 C98 C103 C106 C107 C110 C189 C190 C223 C226 C227 C230 C235 C245 C246 C249: library part 293D477X0004D2TE3, "CAP TANT 470UF 20% 4V 2917", Device Package="2917 (7343 Metric)", ESR (Equivalent Series Resistance)=600mOhm, MANUFACTURER="Vishay Sprague", Manufacturer Size Code=D, Operating Temperature="-55°C ~ 125°C", Supplier Part Number 1=718-293D477X0004D2TE3CT-ND, Tolerance=±20%, Voltage - Rated="4 V", Capacitance="470 µF", ComponentLink1Description=Datasheet, ComponentLink1URL=http://www.vishay.com/docs/40002/293d.pdf, ComponentLink2Description="DigiKey Link", ComponentLink2URL=https://www.digikey.com/en/products/detail/vishay-sprague/293D477X0004D2TE3/1578956, Features="General Purpose", Height - Seated (Max)="0.122\" (3.10mm)", lastupdated="4/5/2026 8:13:53 PM", Lifecycle Status=Active, Minimum Order=1, Mounting Type="Surface Mount", Package / Case="2917 (7343 Metric)", packaging=TapeAndReel, PART NUMBER=293D477X0004D2TE3, Part Status=Active, partid=2464, Price=0.81, series="TANTAMOUNT®, 293D", Size / Dimension="0.287\" L x 0.169\" W (7.30mm x 4.30mm)", Supplier 1=DigiKey, Type=Molded
C12 C33 C47 C58 C60 C111 C112 C113 C114 C204 C209 C237 C240: library part 0805BW106K160NGT, "CAP CER 10UF 16V X5R 0805", Device Package="0805 (2012 Metric)", MANUFACTURER="Knowles Novacap", Operating Temperature="-55°C ~ 85°C", Supplier Part Number 1=1763-1170-1-ND, Temperature Coefficient=X5R, Tolerance=±10%, Voltage - Rated=16V, Applications="SMPS Filtering", Capacitance="10 µF", ComponentLink1Description=Datasheet, ComponentLink1URL=https://www.knowlescapacitors.com/getattachment/6c8d48ef-fc2b-4752-ae2c-ce6c208de0c4/High-Capacitance-Chip.aspx, ComponentLink2Description="DigiKey Link", ComponentLink2URL=https://www.digikey.com/en/products/detail/knowles-novacap/0805BW106K160NGT/7303991, Features="Bonding Mountable, Gold Flash Termination", lastupdated="4/6/2026 7:32:52 PM", Lifecycle Status=Active, Minimum Order=1, Mounting Type="Surface Mount, MLCC, Epoxy", Package / Case="0805 (2012 Metric)", packaging=TapeAndReel, PART NUMBER=0805BW106K160NGT, Part Status=Active, partid=10571, Price=1.74, series=-, Size / Dimension="0.080\" L x 0.050\" W (2.03mm x 1.27mm)", Supplier 1=DigiKey, Thickness (Max)="0.054\" (1.37mm)"
C13 C14 C17 C18 C21 C34 C35 C38 C39 C42 C50 C62 C79 C90: library part 0805B475K100CT, "CAP CER 4.7UF 10V X7R 0805", Device Package="0805 (2012 Metric)", MANUFACTURER="Walsin Technology Corporation", Operating Temperature="-55°C ~ 125°C", Supplier Part Number 1=1292-0805B475K100CT-ND, Temperature Coefficient=X7R, Tolerance=±10%, Voltage - Rated=10V, Applications="General Purpose", Capacitance="4.7 µF", ComponentLink1Description=Datasheet, ComponentLink1URL=https://www.passivecomponent.com/wp-content/uploads/datasheet/WTC_MLCC_General_Purpose.pdf, ComponentLink2Description="DigiKey Link", ComponentLink2URL=https://www.digikey.com/en/products/detail/walsin-technology-corporation/0805B475K100CT/15987965, lastupdated="4/6/2026 7:29:10 PM", Lifecycle Status=Active, Minimum Order=1, Mounting Type="Surface Mount, MLCC", Package / Case="0805 (2012 Metric)", packaging=TapeAndReel, PART NUMBER=0805B475K100CT, partid=72231, Price=0.02, series=-, Size / Dimension="0.079\" L x 0.049\" W (2.00mm x 1.25mm)", Supplier 1=DigiKey, Thickness (Max)="0.057\" (1.45mm)"
C15 C19 C22 C28 C36 C40 C43 C51 C55: library part 0805B105K160CT, "CAP CER 1UF 16V X7R 0805", Device Package="0805 (2012 Metric)", MANUFACTURER="Walsin Technology Corporation", Operating Temperature="-55°C ~ 125°C", Supplier Part Number 1=1292-0805B105K160CT-ND, Temperature Coefficient=X7R, Tolerance=±10%, Voltage - Rated=16V, Applications="General Purpose", Capacitance="1 µF", ComponentLink1Description=Datasheet, ComponentLink1URL=https://www.passivecomponent.com/wp-content/uploads/datasheet/WTC_MLCC_General_Purpose.pdf, ComponentLink2Description="DigiKey Link", ComponentLink2URL=https://www.digikey.com/en/products/detail/walsin-technology-corporation/0805B105K160CT/6707557, lastupdated="4/6/2026 7:31:51 PM", Lifecycle Status=Active, Minimum Order=1, Mounting Type="Surface Mount, MLCC", Package / Case="0805 (2012 Metric)", packaging=TapeAndReel, PART NUMBER=0805B105K160CT, Part Status=Active, partid=39843, Price=0.01, series=-, Size / Dimension="0.079\" L x 0.049\" W (2.00mm x 1.25mm)", Supplier 1=DigiKey, Thickness (Max)="0.053\" (1.35mm)"
C16 C20 C25 C37 C41 C46 C187 C188 C191 C192 C194 C196 C199 C201 C203 C211 C212 C213 C216_source_iref1 C216_source_iref2 C216_source_iref3 C216_source_iref4 C216_source_iref5 C216_source_iref_01 C216_source_iref_02 C216_source_iref_03 C216_source_iref_04 C220_SelLoad1 C220_SelLoad2 C220_SelLoad3 C220_SelLoad4 C220_SelLoad5 C220_SelLoad6 C220_SelLoad7 C220_SelLoad8 C242_u_sink_iref_gen1 C242_u_sink_iref_gen2 C242_u_sink_iref_gen3 C242_U_sink_iref_gen4 C242_u_sink_iref_gen5 C243_source_iref1 C243_source_iref2 C243_source_iref3 C243_source_iref4 C243_source_iref5 C243_source_iref_01 C243_source_iref_02 C243_source_iref_03 C243_source_iref_04: library part 160R15W104KV4T, "CAP CER 0.1UF 16V X7R 0805", Device Package="0805 (2012 Metric)", MANUFACTURER="Johanson Dielectrics Inc.", Operating Temperature="-55°C ~ 125°C", Supplier Part Number 1=709-1183-1-ND, Temperature Coefficient=X7R, Tolerance=±10%, Voltage - Rated=16V, Applications="General Purpose", Capacitance="0.1 µF", ComponentLink1Description=Datasheet, ComponentLink1URL=https://www.johansondielectrics.com/downloads/catalog/johanson-dielectrics-product-catalog.pdf, ComponentLink2Description="DigiKey Link", ComponentLink2URL=https://www.digikey.com/en/products/detail/johanson-dielectrics-inc/160R15W104KV4T/1859428, lastupdated="4/6/2026 7:32:57 PM", Lifecycle Status=Active, Minimum Order=1, Mounting Type="Surface Mount, MLCC", Package / Case="0805 (2012 Metric)", packaging=TapeAndReel, PART NUMBER=160R15W104KV4T, Part Status=Active, partid=9125, Price=0.03, series=-, Size / Dimension="0.080\" L x 0.050\" W (2.03mm x 1.27mm)", Supplier 1=DigiKey, Thickness (Max)="0.050\" (1.27mm)"
C23 C30 C44 C54 C57: library part 08056D226KAT2A, "CAP CER 22UF 6.3V X5R 0805", Device Package="0805 (2012 Metric)", MANUFACTURER="AVX Corporation", Operating Temperature="-55°C ~ 85°C", Supplier Part Number 1=478-10069-1-ND, Temperature Coefficient=X5R, Tolerance=±10%, Voltage - Rated=6.3V, Applications="General Purpose", Capacitance=22µF, ComponentLink1Description=Datasheet, ComponentLink1URL=http://datasheets.avx.com/cx5r.pdf, ComponentLink2Description="DigiKey Link", ComponentLink2URL=http://digikey.com/product-detail/en/avx-corporation/08056D226KAT2A/478-10069-1-ND/6564291, lastupdated="9/2/2020 1:04:40 AM", Lifecycle Status=Active, Minimum Order=1, Mounting Type="Surface Mount, MLCC", Package / Case="0805 (2012 Metric)", packaging=TapeAndReel, PART NUMBER=08056D226KAT2A, Part Status=Active, partid=3404, Price=0.18, series=-, Size / Dimension="0.079\" L x 0.049\" W (2.01mm x 1.25mm)", Supplier 1=DigiKey, Thickness (Max)="0.060\" (1.52mm)"
C24 C29 C31 C45 C49 C53 C56: library part 0805B225K250CT, "CAP CER 2.2UF 25V X7R 0805", Device Package="0805 (2012 Metric)", MANUFACTURER="Walsin Technology Corporation", Operating Temperature="-55°C ~ 125°C", Supplier Part Number 1=1292-0805B225K250CT-ND, Temperature Coefficient=X7R, Tolerance=±10%, Voltage - Rated=25V, Applications="General Purpose", Capacitance="2.2 µF", ComponentLink1Description=Datasheet, ComponentLink1URL=https://www.passivecomponent.com/wp-content/uploads/datasheet/WTC_MLCC_General_Purpose.pdf, ComponentLink2Description="DigiKey Link", ComponentLink2URL=https://www.digikey.com/en/products/detail/walsin-technology-corporation/0805B225K250CT/14836806, lastupdated="4/6/2026 7:31:50 PM", Lifecycle Status=Active, Minimum Order=1, Mounting Type="Surface Mount, MLCC", Package / Case="0805 (2012 Metric)", packaging=TapeAndReel, PART NUMBER=0805B225K250CT, Part Status=Active, partid=40661, Price=0.01, series=-, Size / Dimension="0.079\" L x 0.049\" W (2.00mm x 1.25mm)", Supplier 1=DigiKey, Thickness (Max)="0.057\" (1.45mm)"
C26 C27 C48: library part AMK212BBJ107MG-TE, "CAP CER 100UF 4V X5R 0805", Device Package="0805 (2012 Metric)", MANUFACTURER="Taiyo Yuden", Operating Temperature="-55°C ~ 85°C", Supplier Part Number 1=587-AMK212BBJ107MG-TECT-ND, Temperature Coefficient=X5R, Tolerance=±20%, Voltage - Rated=4V, Applications="SMPS Filtering", Capacitance="100 µF", ComponentLink1Description=Datasheet, ComponentLink1URL=https://mm.digikey.com/Volume0/opasdata/d220001/medias/docus/421/AMK212BBJ107MG-TE_SS.pdf, ComponentLink2Description="DigiKey Link", ComponentLink2URL=https://www.digikey.com/en/products/detail/taiyo-yuden/AMK212BBJ107MG-TE/11675691, lastupdated="4/6/2026 7:29:11 PM", Lifecycle Status=Active, Minimum Order=1, Mounting Type="Surface Mount, MLCC", Package / Case="0805 (2012 Metric)", packaging=TapeAndReel, PART NUMBER=AMK212BBJ107MG-TE, partid=72301, Price=0.44, series=M, Size / Dimension="0.079\" L x 0.049\" W (2.00mm x 1.25mm)", Supplier 1=DigiKey, Thickness (Max)="0.057\" (1.45mm)"
C32 C52: library part C0805C683J1REC7210, "CAP CER 0805 68NF 100V X7R 5%", Device Package="0805 (2012 Metric)", MANUFACTURER=KEMET, Operating Temperature="-55°C ~ 125°C", Supplier Part Number 1=399-C0805C683J1REC7210CT-ND, Temperature Coefficient=X7R, Tolerance=±5%, Voltage - Rated=100V, Applications="ESD Protection", Capacitance="0.068 µF", ComponentLink1Description=Datasheet, ComponentLink1URL=https://connect.kemet.com:7667/gateway/IntelliData-ComponentDocumentation/1.0/download/datasheet/C0805C683J1REC7210, ComponentLink2Description="DigiKey Link", ComponentLink2URL=https://www.digikey.com/en/products/detail/kemet/C0805C683J1REC7210/8645206, lastupdated="4/6/2026 7:31:29 PM", Lifecycle Status=Active, Minimum Order=1, Mounting Type="Surface Mount, MLCC", Package / Case="0805 (2012 Metric)", packaging=TapeAndReel, PART NUMBER=C0805C683J1REC7210, Part Status=Active, partid=48814, Price=0.04, series="ESD SMD Comm X7R", Size / Dimension="0.079\" L x 0.049\" W (2.00mm x 1.25mm)", Supplier 1=DigiKey, Thickness (Max)="0.043\" (1.10mm)"
C59 C61 C239: library part C0805C103F1GECAUTO, "CAP CER 0805 10NF 100V C0G 1%", Device Package="0805 (2012 Metric)", MANUFACTURER=KEMET, Operating Temperature="-55°C ~ 125°C", Ratings=AEC-Q200, Supplier Part Number 1=399-C0805C103F1GECAUTOCT-ND, Temperature Coefficient="C0G, NP0", Tolerance=±1%, Voltage - Rated=100V, Applications="Automotive, ESD Protection", Capacitance="10000 pF", ComponentLink1Description=Datasheet, ComponentLink1URL=https://connect.kemet.com:7667/gateway/IntelliData-ComponentDocumentation/1.0/download/datasheet/C0805C103F1GECAUTO, ComponentLink2Description="DigiKey Link", ComponentLink2URL=https://www.digikey.com/en/products/detail/kemet/C0805C103F1GECAUTO/8647293, Features="Low ESL, Low ESR", lastupdated="4/6/2026 7:31:32 PM", Lifecycle Status=Active, Minimum Order=1, Mounting Type="Surface Mount, MLCC", Package / Case="0805 (2012 Metric)", packaging=TapeAndReel, PART NUMBER=C0805C103F1GECAUTO, Part Status=Active, partid=49035, Price=0.47, series="ESD SMD Auto C0G", Size / Dimension="0.079\" L x 0.049\" W (2.00mm x 1.25mm)", Supplier 1=DigiKey, Thickness (Max)="0.039\" (1.00mm)"
C63 C64 C65 C66 C67 C68 C69 C70 C71 C72 C73 C74 C75 C76 C77 C78 C80 C81 C82 C83 C84 C85 C86 C87 C88 C89: "smd capaciteit, verp.0402, 100nF", Component Type=Standard, PART NUMBER=CSMD402/100nF, Pin Count=2, Supplier 1=Farnell
C91 C92: library part 251R15S270GV4E, "CAP CER 27PF 250V NP0 0805", Device Package="0805 (2012 Metric)", MANUFACTURER="Johanson Technology Inc.", Operating Temperature="-55°C ~ 125°C", Supplier Part Number 1=712-1738-1-ND, Temperature Coefficient="C0G, NP0", Tolerance=±2%, Voltage - Rated=250V, Applications="RF, Microwave, High Frequency", Capacitance="27 pF", ComponentLink1Description=Datasheet, ComponentLink1URL=https://www.johansontechnology.com/downloads/catalog/johanson-technology-multi-layer-high-q-capacitors.pdf, ComponentLink2Description="DigiKey Link", ComponentLink2URL=https://www.digikey.com/en/products/detail/johanson-technology-inc/251R15S270GV4E/1919491, Features="High Q, Low Loss, Ultra Low ESR", lastupdated="4/6/2026 7:32:15 PM", Lifecycle Status=Active, Minimum Order=1, Mounting Type="Surface Mount, MLCC", Package / Case="0805 (2012 Metric)", packaging=TapeAndReel, PART NUMBER=251R15S270GV4E, Part Status=Active, partid=18397, Price=0.14, series=S, Size / Dimension="0.080\" L x 0.050\" W (2.03mm x 1.27mm)", Supplier 1=DigiKey, Thickness (Max)="0.046\" (1.17mm)"
C93 C94 C210: library part 251R15S120GV4E, "CAP CER 12PF 250V NP0 0805", Device Package="0805 (2012 Metric)", MANUFACTURER="Johanson Technology Inc.", Operating Temperature="-55°C ~ 125°C", Supplier Part Number 1=712-1722-1-ND, Temperature Coefficient="C0G, NP0", Tolerance=±2%, Voltage - Rated=250V, Applications="RF, Microwave, High Frequency", Capacitance="12 pF", ComponentLink1Description=Datasheet, ComponentLink1URL=https://www.johansontechnology.com/downloads/catalog/johanson-technology-multi-layer-high-q-capacitors.pdf, ComponentLink2Description="DigiKey Link", ComponentLink2URL=https://www.digikey.com/en/products/detail/johanson-technology-inc/251R15S120GV4E/1919438, Features="High Q, Low Loss, Ultra Low ESR", lastupdated="4/6/2026 7:32:26 PM", Lifecycle Status=Active, Minimum Order=1, Mounting Type="Surface Mount, MLCC", Package / Case="0805 (2012 Metric)", packaging=TapeAndReel, PART NUMBER=251R15S120GV4E, Part Status=Active, partid=16409, Price=0.13, series=S, Size / Dimension="0.080\" L x 0.050\" W (2.03mm x 1.27mm)", Supplier 1=DigiKey, Thickness (Max)="0.046\" (1.17mm)"
C95: library part C0805C103F3GEC7800, "CAP CER 0805 10NF 25V C0G 1%", Device Package="0805 (2012 Metric)", MANUFACTURER=KEMET, Operating Temperature="-55°C ~ 125°C", Supplier Part Number 1=399-C0805C103F3GEC7800CT-ND, Temperature Coefficient="C0G, NP0", Tolerance=±1%, Voltage - Rated=25V, Applications="ESD Protection", Capacitance="10000 pF", ComponentLink1Description=Datasheet, ComponentLink1URL=https://connect.kemet.com:7667/gateway/IntelliData-ComponentDocumentation/1.0/download/datasheet/C0805C103F3GEC7800, ComponentLink2Description="DigiKey Link", ComponentLink2URL=https://www.digikey.com/en/products/detail/kemet/C0805C103F3GEC7800/8644419, Features="Low ESL, Low ESR", lastupdated="4/6/2026 7:29:19 PM", Lifecycle Status=Active, Minimum Order=1, Mounting Type="Surface Mount, MLCC", Package / Case="0805 (2012 Metric)", packaging=TapeAndReel, PART NUMBER=C0805C103F3GEC7800, partid=72904, Price=0.43, series="ESD SMD Comm C0G", Size / Dimension="0.079\" L x 0.049\" W (2.00mm x 1.25mm)", Supplier 1=DigiKey, Thickness (Max)="0.039\" (1.00mm)"
C115 C117 C119 C121 C123 C125 C128 C130 C132 C134 C136 C138 C140 C142 C146 C148 C150 C152 C154 C156 C158 C160 C163 C165 C167 C169 C171 C173 C175 C177 C181: library part C0805X104K8RAC7800, ".100UF 10.0V", Device Package="0805 (2012 Metric)", MANUFACTURER=KEMET, Operating Temperature="-55°C ~ 125°C", Supplier Part Number 1=399-C0805X104K8RAC7800CT-ND, Temperature Coefficient=X7R, Tolerance=±10%, Voltage - Rated=10V, Applications="Boardflex Sensitive", Capacitance="0.1 µF", ComponentLink1Description=Datasheet, ComponentLink1URL=https://connect.kemet.com:7667/gateway/IntelliData-ComponentDocumentation/1.0/download/datasheet/C0805X104K8RAC7800, ComponentLink2Description="DigiKey Link", ComponentLink2URL=https://www.digikey.com/en/products/detail/kemet/C0805X104K8RAC7800/12083302, Features="Soft Termination", lastupdated="4/6/2026 7:31:44 PM", Lifecycle Status=Active, Minimum Order=1, Mounting Type="Surface Mount, MLCC", Package / Case="0805 (2012 Metric)", packaging=TapeAndReel, PART NUMBER=C0805X104K8RAC7800, Part Status=Active, partid=46188, Price=0.11, series="SMD Comm X7R Flex", Size / Dimension="0.079\" L x 0.049\" W (2.00mm x 1.25mm)", Supplier 1=DigiKey, Thickness (Max)="0.039\" (0.98mm)"
C116 C118 C120 C122 C124 C126: library part GMC21X7R225K10NT, "CAP0805 X7R 2.2UF 10% 10V", Device Package="0805 (2012 Metric)", MANUFACTURER="Cal-Chip Electronics, Inc.", Operating Temperature="-55°C ~ 125°C", Supplier Part Number 1=4713-GMC21X7R225K10NTCT-ND, Temperature Coefficient=X7R, Tolerance=±10%, Voltage - Rated=10V, Applications="General Purpose", Capacitance="2.2 µF", ComponentLink2Description="DigiKey Link", ComponentLink2URL=https://www.digikey.com/en/products/detail/cal-chip-electronics-inc/GMC21X7R225K10NT/22099349, lastupdated="4/6/2026 7:29:32 PM", Lifecycle Status=Active, Minimum Order=1, Mounting Type="Surface Mount, MLCC", Package / Case="0805 (2012 Metric)", packaging=TapeAndReel, PART NUMBER=GMC21X7R225K10NT, partid=73352, Price=0.02, series=GMC, Size / Dimension="0.079\" L x 0.049\" W (2.00mm x 1.25mm)", Supplier 1=DigiKey, Thickness (Max)="0.057\" (1.45mm)"
C127 C129 C131 C133 C135 C137 C139 C141 C145 C147 C149 C151 C153 C155 C157 C159 C162 C164 C166 C168 C170 C172 C174 C176 C180: library part C0805Y103K4RACTU, ".010UF 16.0V", Device Package="0805 (2012 Metric)", MANUFACTURER=KEMET, Operating Temperature="-55°C ~ 125°C", Supplier Part Number 1=399-C0805Y103K4RACTUCT-ND, Temperature Coefficient=X7R, Tolerance=±10%, Voltage - Rated=16V, Applications="Boardflex Sensitive", Capacitance="10000 pF", ComponentLink1Description=Datasheet, ComponentLink1URL=https://search.kemet.com/download/datasheet/C0805Y103K4RAC7800, ComponentLink2Description="DigiKey Link", ComponentLink2URL=https://www.digikey.com/en/products/detail/kemet/C0805Y103K4RACTU/12083238, Features="Floating Electrode, Soft Termination", lastupdated="4/6/2026 7:28:53 PM", Lifecycle Status=Active, Minimum Order=1, Mounting Type="Surface Mount, MLCC", Package / Case="0805 (2012 Metric)", packaging=TapeAndReel, PART NUMBER=C0805Y103K4RACTU, partid=70534, Price=0.07, series="SMD Comm X7R FF", Size / Dimension="0.079\" L x 0.049\" W (2.00mm x 1.25mm)", Supplier 1=DigiKey, Thickness (Max)="0.039\" (0.98mm)"
C143 C144 C161 C178 C179 C182 C183 C184 C185: library part C0805C102F3HACAUTO, "CAP CER 0805 1NF 25V ULTRA STABL", Device Package="0805 (2012 Metric)", MANUFACTURER=KEMET, Operating Temperature="-55°C ~ 150°C", Ratings=AEC-Q200, Supplier Part Number 1=399-C0805C102F3HACAUTOCT-ND, Temperature Coefficient=X8R, Tolerance=±1%, Voltage - Rated=25V, Applications=Automotive, Capacitance="1000 pF", ComponentLink1Description=Datasheet, ComponentLink1URL=https://api.kemet.com/component-edge/download/datasheet/C0805C102F3HACAUTO.pdf, ComponentLink2Description="DigiKey Link", ComponentLink2URL=https://www.digikey.com/en/products/detail/kemet/C0805C102F3HACAUTO/7958218, Features="Low ESL, High Temperature", lastupdated="4/6/2026 7:32:03 PM", Lifecycle Status=Active, Minimum Order=1, Mounting Type="Surface Mount, MLCC", Package / Case="0805 (2012 Metric)", packaging=TapeAndReel, PART NUMBER=C0805C102F3HACAUTO, Part Status=Active, partid=32894, Price=0.05, series="SMD Auto X8R HT150C", Size / Dimension="0.079\" L x 0.049\" W (2.00mm x 1.25mm)", Supplier 1=DigiKey, Thickness (Max)="0.035\" (0.88mm)"
C205: library part CC0805MRX7R9BB104, "CAP CER 0.1UF 50V X7R 0805", Device Package="0805 (2012 Metric)", MANUFACTURER=Yageo, Operating Temperature="-55°C ~ 125°C", Supplier Part Number 1=311-4351-1-ND, Temperature Coefficient=X7R, Tolerance=±20%, Voltage - Rated=50V, Applications="General Purpose", Capacitance="0.1 µF", ComponentLink1Description=Datasheet, ComponentLink1URL=https://www.yageo.com/upload/media/product/productsearch/datasheet/mlcc/UPY-GPHC_X7R_6.3V-to-50V_18.pdf, ComponentLink2Description="DigiKey Link", ComponentLink2URL=https://www.digikey.com/en/products/detail/yageo/CC0805MRX7R9BB104/5884281, lastupdated="4/6/2026 7:33:19 PM", Lifecycle Status=Active, Minimum Order=1, Mounting Type="Surface Mount, MLCC", Package / Case="0805 (2012 Metric)", packaging=TapeAndReel, PART NUMBER=CC0805MRX7R9BB104, Part Status=Active, partid=2475, Price=0.01, series=CC, Size / Dimension="0.079\" L x 0.049\" W (2.00mm x 1.25mm)", Supplier 1=DigiKey, Thickness (Max)="0.037\" (0.95mm)"
C238 C241: library part C0805C103J4RECAUTO7210, "CAP CER 0805 10NF 16V X7R 5%", Device Package="0805 (2012 Metric)", MANUFACTURER=KEMET, Operating Temperature="-55°C ~ 125°C", Ratings=AEC-Q200, Supplier Part Number 1=399-C0805C103J4RECAUTO7210CT-ND, Temperature Coefficient=X7R, Tolerance=±5%, Voltage - Rated=16V, Applications="Automotive, ESD Protection", Capacitance="10000 pF", ComponentLink1Description=Datasheet, ComponentLink1URL=https://connect.kemet.com:7667/gateway/IntelliData-ComponentDocumentation/1.0/download/datasheet/C0805C103J4RECAUTO7210, ComponentLink2Description="DigiKey Link", ComponentLink2URL=https://www.digikey.com/en/products/detail/kemet/C0805C103J4RECAUTO7210/8647961, lastupdated="4/6/2026 7:31:41 PM", Lifecycle Status=Active, Minimum Order=1, Mounting Type="Surface Mount, MLCC", Package / Case="0805 (2012 Metric)", packaging=TapeAndReel, PART NUMBER=C0805C103J4RECAUTO7210, Part Status=Active, partid=47286, Price=0.05, series="ESD SMD Auto X7R", Size / Dimension="0.079\" L x 0.049\" W (2.00mm x 1.25mm)", Supplier 1=DigiKey, Thickness (Max)="0.035\" (0.88mm)"
D1 D2: "DIODE GEN PURP 50V 2A DO214AA", Capacitance @ Vr, F="18pF @ 4V, 1MHz", Current - Average Rectified (Io)=2A, Current - Reverse Leakage @ Vr="10µA @ 50V", MANUFACTURER="ON Semiconductor", Operating Temperature - Junction="-55°C ~ 150°C", Package / Case="DO-214AA, SMB", Supplier Device Package="DO-214AA (SMB)", Supplier Part Number 1=ES2AFSCT-ND, Voltage - DC Reverse (Vr) (Max)=50V, Voltage - Forward (Vf) (Max) @ If="900mV @ 2A", ComponentLink1Description=Datasheet, ComponentLink1URL=https://www.onsemi.com/pub/Collateral/ES2D-D.pdf, ComponentLink2Description="DigiKey Link", ComponentLink2URL=http://digikey.com/product-detail/en/on-semiconductor/ES2A/ES2AFSCT-ND/3042548, Diode Type=Standard, lastupdated="4/5/2026 8:31:04 PM", Lifecycle Status=Active, Minimum Order=1, Mounting Type="Surface Mount", packaging=TapeAndReel, PART NUMBER=ES2A, Part Status=Active, partid=120, Price=0.12, Reverse Recovery Time (trr)=20ns, series=-, Speed="Fast Recovery =< 500ns, > 200mA (Io)", Supplier 1=DigiKey
E1 E2 J3 J4 J5 J8 J9 J10: Package=None, Availability=Unavailable, Price=None
  E1 E2: MP=1-1478979-0
  J3 J4 J5 J8 J9 J10: MP=61300311121
FB1 FB2 FB3: library part BLM21HE601SH1L, "FERRITE BEAD 600 OHM 0805 1LN", Current Rating (Max)=2.3A, DC Resistance (DCR) (Max)=55mOhm, Device Package="0805 (2012 Metric)", MANUFACTURER="Murata Electronics", Operating Temperature="-55°C ~ 125°C", Ratings=AEC-Q200, Supplier Part Number 1=490-BLM21HE601SH1LCT-ND, ComponentLink2Description="DigiKey Link", ComponentLink2URL=https://www.digikey.com/en/products/detail/murata-electronics/BLM21HE601SH1L/17184949, Features=Automotive, Filter Type="Signal Line", Height (Max)="0.057\" (1.45mm)", Impedance @ Frequency="600 Ohms @ 100 MHz", lastupdated="4/5/2026 8:28:54 PM", Lifecycle Status=Active, Minimum Order=1, Mounting Type="Surface Mount", Number of Lines=1, Package / Case="0805 (2012 Metric)", packaging=TapeAndReel, PART NUMBER=BLM21HE601SH1L, Part Status=Active, partid=3271, Price=0.12, series=BLM21H, Size / Dimension="0.079\" L x 0.049\" W (2.00mm x 1.25mm)", Supplier 1=DigiKey
FMC1: library part ASP-134604-01, "CONN HDR 160POS SMD VITA 57.1", Package=None, Availability=Unavailable, MP=ASP-134604-01, Price=None
J1: "Description", Manufacturer_Name="Global Connector Technology", Copyright="Copyright (C) 2025 Ultra Librarian. All rights reserved.", Manufacturer_Part_Number=USB4085-GF-A, RefDes=RefDes, Type=Type
J2: "Description", Manufacturer_Name=Aries, Copyright="Copyright (C) 2026 Ultra Librarian. All rights reserved.", Manufacturer_Part_Number=169-PRS13001-12, RefDes=RefDes, Type=Type
J6: "2.00mm Pitch Milli-Grid Header, Through Hole, Vertical, 30 Circuits, 0.38Âµm Gold (Au) Selective Plating, Pocket Tray Packaging, Lead-Free", Manufacturer_Name="Molex Connector Corporation", Copyright="Copyright (C) 2025 Ultra Librarian. All rights reserved.", Manufacturer_Part_Number=877583016, RefDes=RefDes, Type=Type